# EAGLE board TransmitterSchematic (EAGLE 7.5.0)
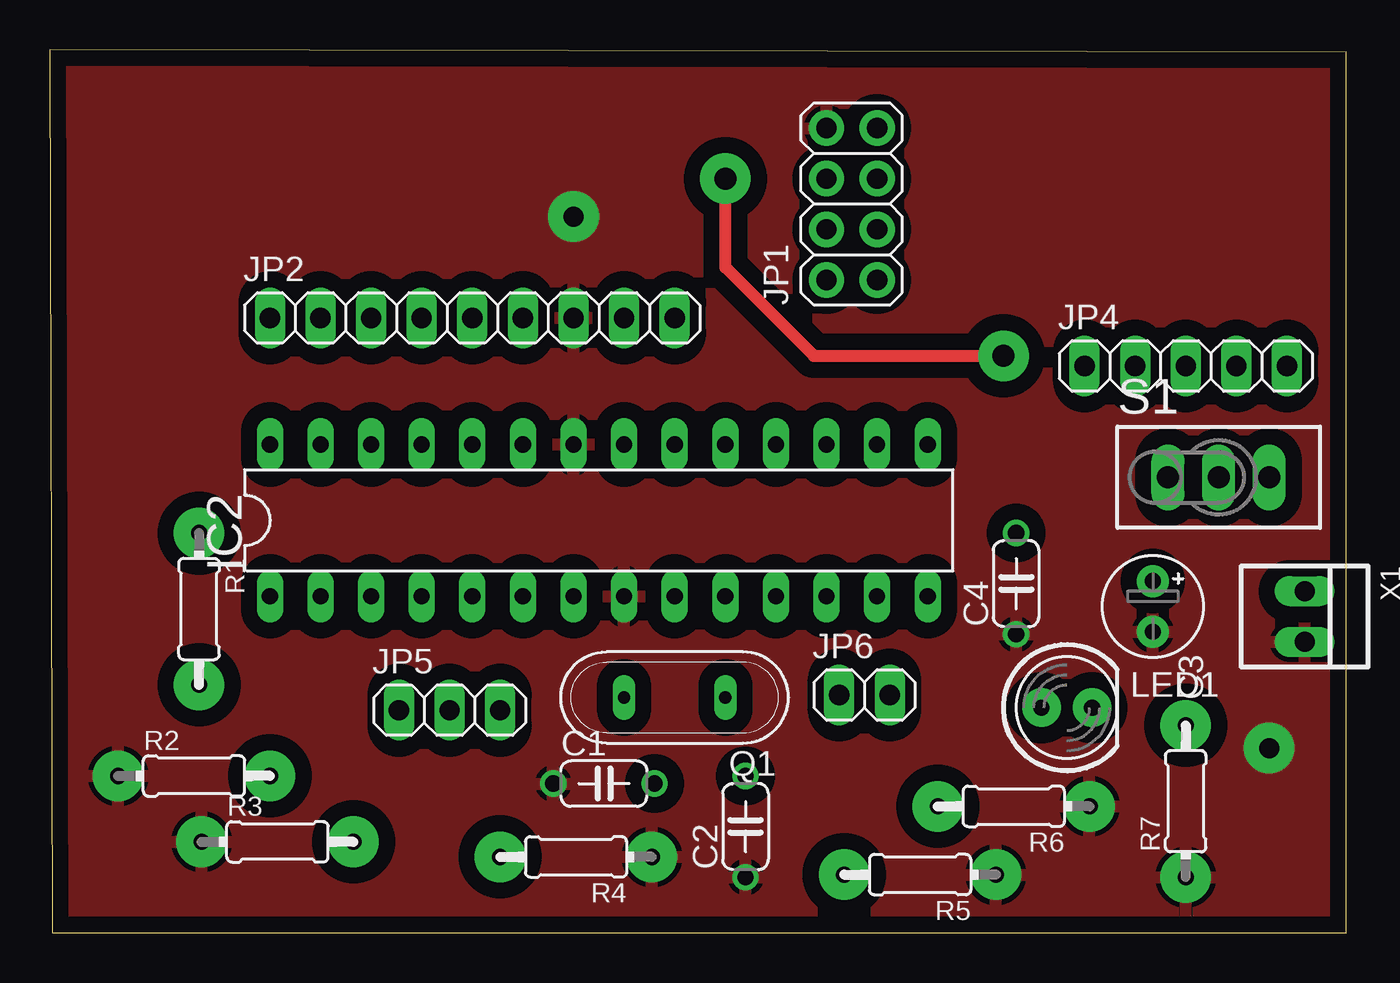
[diagram p0: board, top side]
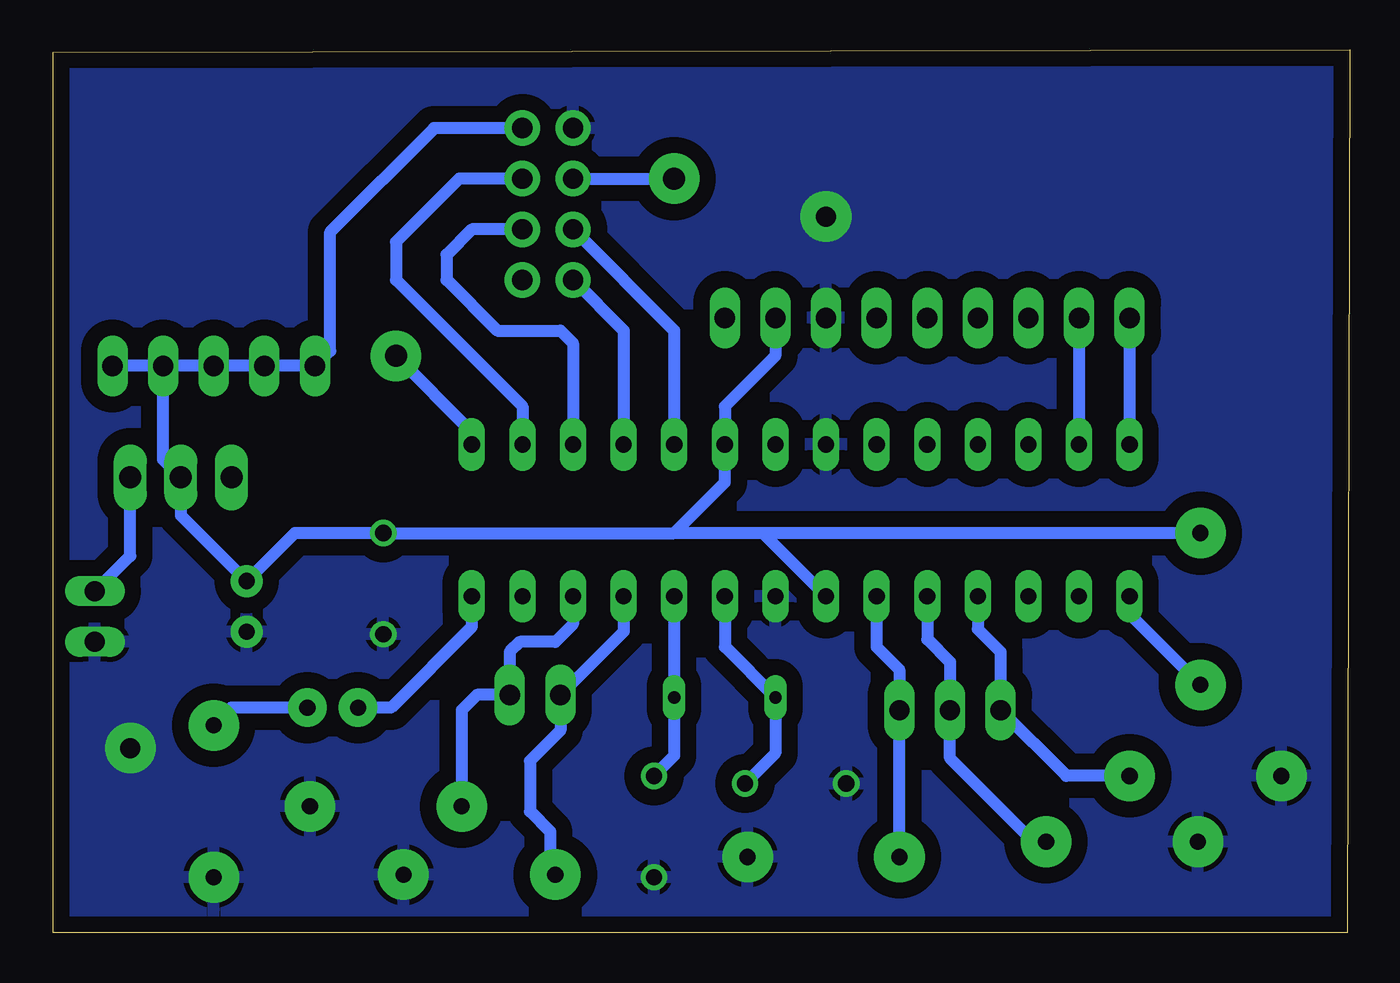
[diagram p1: board, bottom side, seen from below]

Size 65.07 x 44.31 mm. Coordinates in mm from the lower left corner, seen from the top.
Outline: 0.13,0 65.07,0 65.07,44.19 0,44.31 0.13,0
Copper layers (1*16): Top 0.035mm / dielectric 1.5mm / Bottom 0.035mm
Design rules "TE": minimum track width 12mil, minimum drill 23mil, track to track 10mil, track to pad 10mil, pad to pad 10mil, via to via 10mil, smd to smd 10mil, copper to edge 20mil, drill to drill 8mil, minimum pad ring 10mil, minimum via ring 8mil, stop-mask expansion 4mil, vias tented up to drill 0mil, thermal gap 10mil

## Footprints (pad centres in the part's own frame; a part is rotated, then mirrored left to right if it is on the bottom)
C050-024X044 = drill 0.813: 1 -2.54,0; 2 2.54,0
E2,5-5 = drill 0.813 pad 1.6: + -1.27,0; - 1.27,0
DIL28-3 = drill 0.813 long: 1 -16.51,-3.81; 2 -13.97,-3.81; 3 -11.43,-3.81; 4 -8.89,-3.81; 5 -6.35,-3.81; 6 -3.81,-3.81; 7 -1.27,-3.81; 8 1.27,-3.81; 9 3.81,-3.81; 10 6.35,-3.81; 11 8.89,-3.81; 12 11.43,-3.81; 13 13.97,-3.81; 14 16.51,-3.81; 15 16.51,3.81; 16 13.97,3.81; 17 11.43,3.81; 18 8.89,3.81; 19 6.35,3.81; 20 3.81,3.81; 21 1.27,3.81; 22 -1.27,3.81; 23 -3.81,3.81; 24 -6.35,3.81; 25 -8.89,3.81; 26 -11.43,3.81; 27 -13.97,3.81; 28 -16.51,3.81
2X04 = drill 1.016 pad 1.778: 1 -3.81,-1.27; 2 -3.81,1.27; 3 -1.27,-1.27; 4 -1.27,1.27; 5 1.27,-1.27; 6 1.27,1.27; 7 3.81,-1.27; 8 3.81,1.27
1X09 = drill 1.016 long: 1 -10.16,0; 2 -7.62,0; 3 -5.08,0; 4 -2.54,0; 5 0,0; 6 2.54,0; 7 5.08,0; 8 7.62,0; 9 10.16,0
1X05 = drill 1.016 long: 1 -5.08,0; 2 -2.54,0; 3 0,0; 4 2.54,0; 5 5.08,0
1X03 = drill 1.016 long: 1 -2.54,0; 2 0,0; 3 2.54,0
1X02 = drill 1.016 long: 1 -1.27,0; 2 1.27,0
LED5MM = drill 0.813 pad 1.93: A -1.27,0; K 1.27,0
QS = drill 0.61 long: 1 -2.54,0; 2 2.54,0
0204/7 = drill 0.813 pad 2.54: 1 -3.81,0; 2 3.81,0
TL3XPO = drill 1.1 pad 1.422 long: 1 -2.54,0; 2 0,0; 3 2.54,0
22-23-2021 = drill 1 long: 1 -1.27,0; 2 1.27,0

## Placement (x,y rotation side)
C1  22pF  [C050-024X044]  27.81,7.49 0 top
C2  22pF  [C050-024X044]  34.93,5.33 90 top
C3  10uF  [E2,5-5]  55.37,16.38 270 top
C4  1nF  [C050-024X044]  48.51,17.53 90 top
IC2  ATMEGA328-20P  [DIL28-3]  27.56,20.7 0 top
JP1  [2X04]  40.26,36.58 90 top
JP2  [1X09]  21.21,30.86 0 top
JP4  [1X05]  57.02,28.45 0 top
JP5  [1X03]  20.07,11.18 0 top
JP6  [1X02]  40.89,11.94 0 top
LED1  [LED5MM]  51.05,11.3 0 top
Q1  [QS]  31.37,11.81 180 top
R1  10k  [0204/7]  7.49,16.26 270 top
R2  10k  [0204/7]  7.24,7.87 0 top
R3  10k  [0204/7]  11.43,4.57 0 top
R4  10k  [0204/7]  26.42,3.81 180 top
R5  10k  [0204/7]  43.69,2.92 180 top
R6  10k  [0204/7]  48.39,6.35 180 top
R7  220  [0204/7]  57.02,6.6 90 top
S1  TL32PO  [TL3XPO]  58.67,22.86 0 top
X1  22-23-2021  [22-23-2021]  62.99,15.88 270 top

## Library data of the parts
C1-C4 R1-R7 = rcl
IC2 = atmega328
JP1 JP2 JP4-JP6 = pinhead
LED1 = jp
Q1 = special
S1 = switch
X1 = con-molex; MF: MOLEX; MPN: 22-23-2021; OC_FARNELL: 1462926; OC_NEWARK: 25C3832

## Nets
CE: IC2.15 JP1.6
CS: JP2.4
CSN: IC2.16 JP1.5
D2: IC2.4 JP5.1 R2.2
D3: IC2.5 JP5.2 R3.2
D4: IC2.6 JP5.3 R4.2
D5: IC2.11 JP6.1 R5.2
D6: IC2.12 JP6.2 R6.2
DRDY: JP2.5
GND: C1.1 C2.1 C3.- C4.1 IC2.8 IC2.22 JP1.8 JP2.7 R2.1 R3.1 R4.1 R5.1 R6.1 R7.1 X1.2
INT1: JP2.6
IRQ: JP1.1
LED: IC2.14 LED1.A
MISO: IC2.18 JP1.2
MOSI: IC2.17 JP1.3
N$1: C1.2 IC2.9 Q1.2
N$2: C2.2 IC2.10 Q1.1
N$3: IC2.1 R1.2
N$4: LED1.K R7.2
N$5: S1.3 X1.1
SA0: JP2.3
SCK: IC2.19 JP1.4
SCL: IC2.28 JP2.1
SDA: IC2.27 JP2.2
VCC: C3.+ C4.2 IC2.7 IC2.20 JP1.7 JP2.8 JP4.1 JP4.2 JP4.3 JP4.4 JP4.5 R1.1 S1.2
VIN: JP2.9

## Tracks (layer width: path | path; a pad name or v marks a point on that pad's centre or on a via)
CE  (via drill 1.1 pad 2.54)
  Top 0.61: v33.91,37.85 33.91,33.4 38.35,28.96 v47.88,28.96
  Bottom 0.61: JP1.6 v33.91,37.85 | IC2.15 44.07,25.15 v47.88,28.96
CSN
  Bottom 0.61: JP1.5 44.7,37.85 47.88,34.67 47.88,32.77 41.53,26.42 IC2.16
D2
  Bottom 0.61: IC2.4 18.67,15.24 17.53,14.1 JP5.1 14.22,7.87 R2.2
D3
  Bottom 0.61: IC2.5 21.21,14.73 20.07,13.59 JP5.2 20.07,8.76 15.88,4.57 R3.2
D4
  Bottom 0.61: IC2.6 23.75,14.35 22.61,13.21 JP5.3 R4.2
D5
  Bottom 0.61: IC2.11 36.45,15.11 JP6.1 39.62,10.16 41.15,8.64 41.15,6.1 40.13,5.08 40.13,3.17 R5.2
D6
  Bottom 0.61: IC2.12 38.99,15.49 39.88,14.61 41.66,14.61 42.16,14.1 JP6.2 43.82,11.94 44.58,11.18 R6.2
GND  (via drill 1 pad 2.54)
  other vias: 61.21,9.27 26.29,35.94
  pour Bottom (isolate 0.813): -0.25,44.32 65.02,44.2 65.02,0 0.13,0
  pour Top (isolate 0.813): -0.25,44.32 65.02,44.32 65.41,0 0.13,0
LED
  Bottom 0.61: IC2.14 44.07,15.37 48.13,11.3 LED1.A
MISO
  Bottom 0.61: JP1.2 36.45,30.23 IC2.18
MOSI
  Bottom 0.61: JP1.3 44.07,35.31 45.34,34.04 45.34,32.77 42.8,30.23 39.62,30.23 38.99,29.59 IC2.17
N$1
  Bottom 0.61: IC2.9 31.37,14.35 Q1.2 28.83,9.02 C1.2
N$2
  Bottom 0.61: IC2.10 Q1.1 33.91,8.89 C2.2
N$3
  Bottom 0.61: IC2.1 11.05,16 R1.2 7.31,12.62
N$4
  Bottom 0.61: LED1.K 56.13,11.3 R7.2
N$5
  Bottom 0.61: X1.1 61.21,18.92 S1.3
SCK
  Bottom 0.61: JP1.4 33.91,30.23 IC2.19
SCL
  Bottom 0.61: JP2.1 IC2.28
SDA
  Bottom 0.61: JP2.2 IC2.27
VCC
  Bottom 0.61: JP2.8 28.83,28.96 31.37,26.42 IC2.20 31.37,22.61 33.91,20.07 | 33.91,20.07 C4.2 52.96,20.07 C3.+ 58.67,20.95 S1.2 59.56,23.75 JP4.4 | IC2.7 29.46,20.07 | 29.46,20.07 33.91,20.07 | JP1.7 45.97,40.39 51.18,35.18 51.18,29.21 JP4.1 JP4.2 JP4.3 JP4.4 | JP4.4 JP4.5 | R1.1 29.46,20.07